# EAGLE board ospi_v12 (EAGLE 6.4)
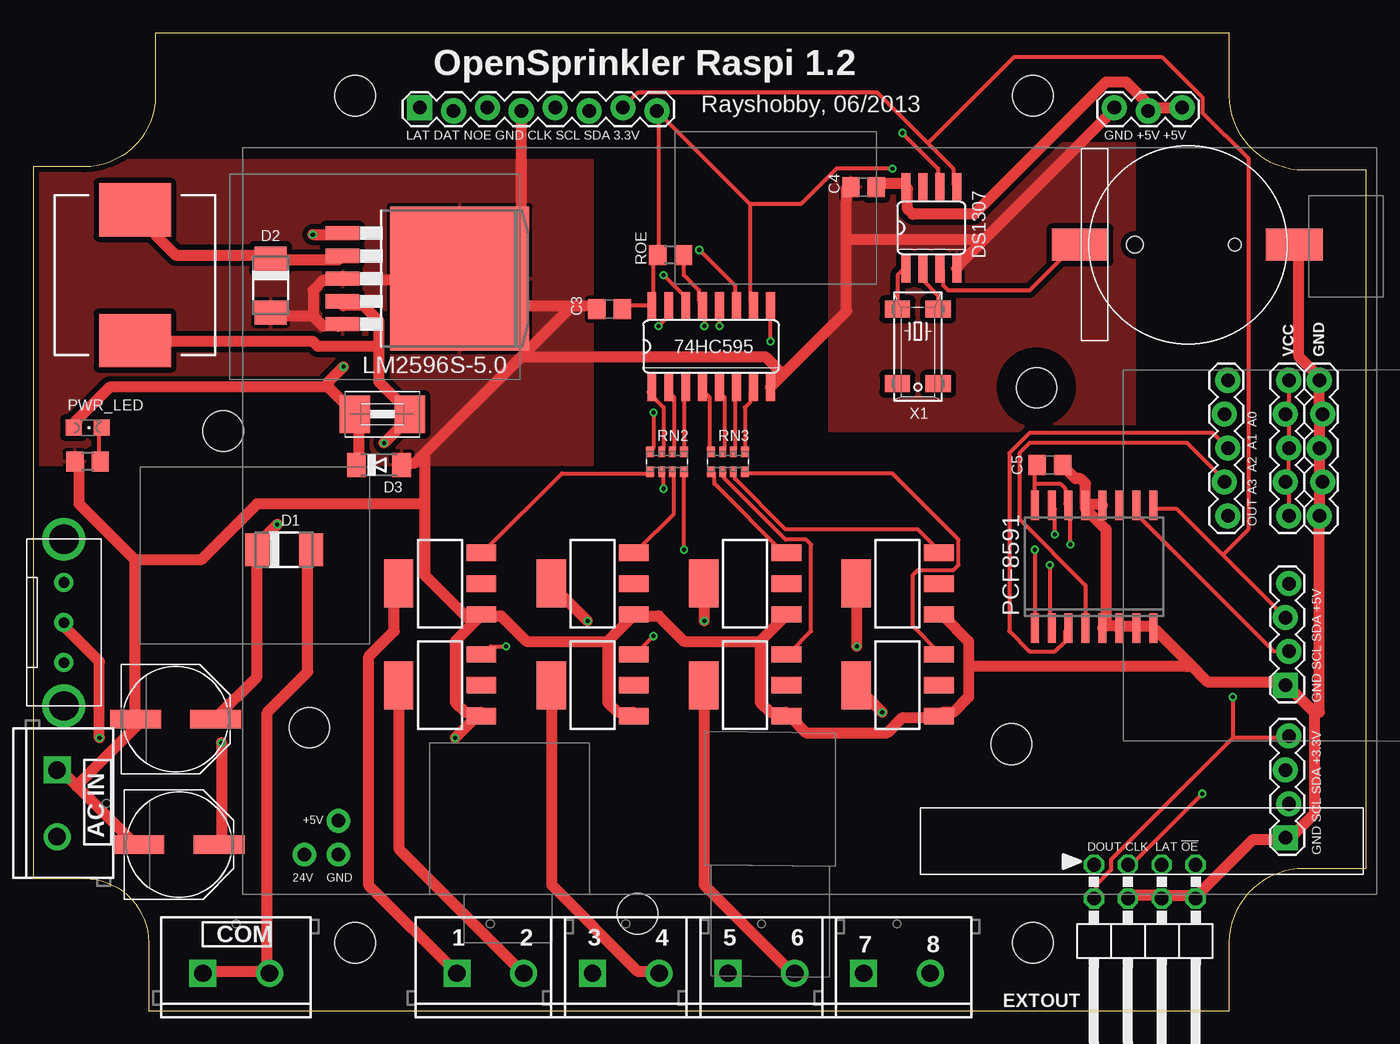
[diagram p0: board, top side]
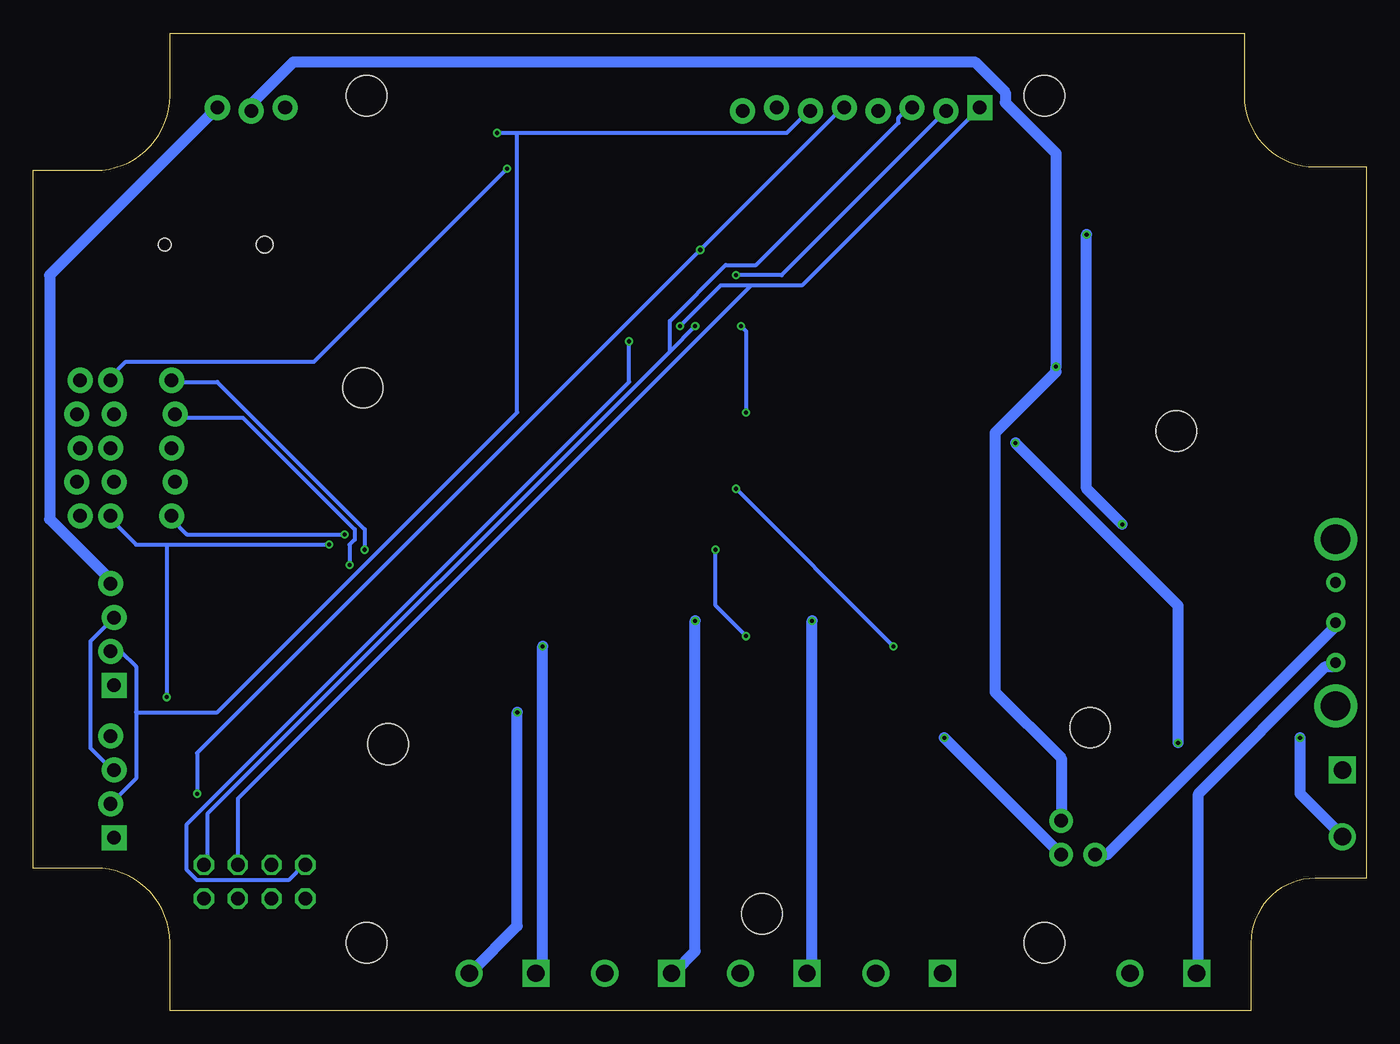
[diagram p1: board, bottom side, seen from below]

Size 99.9 x 73.25 mm. Coordinates in mm from the lower left corner, seen from the top.
Outline: 8.64,0 89.66,0 89.66,5.08 arc-90 95.25,10.67 99.9,10.67 99.9,62.99 95.25,62.99 arc-90 89.66,68.58 89.66,73.25 9.14,73.25 9.14,68.58 arc-90 3.81,63.25 0,63.25 0,9.91 3.81,9.91 arc-90 8.64,5.08 8.64,0
Copper layers (1*16): Top 0.035mm / dielectric 1.5mm / Bottom 0.035mm
Design rules "Fusion_eagle_rule_v1.1": minimum track width 6mil, minimum drill 12mil, track to track 6mil, track to pad 6mil, pad to pad 6mil, via to via 6mil, smd to smd 0mil, copper to edge 10mil, drill to drill 10mil, minimum pad ring 10mil, minimum via ring 6mil, stop-mask expansion 2mil, vias tented up to drill 100mil, thermal gap 10mil
Net classes: 0 default: width 0.305 mm, clearance 0.203 mm; 1 power: width 0.813 mm, clearance 0.406 mm
Holes 3.05 mm at 24.13,5.08 74.93,5.08 24.13,68.58 74.93,68.58
tRestrict: area 21.6,2.5 to 26.7,7.6; area 72.4,2.5 to 77.5,7.6; area 21.6,66 to 26.7,71.1; area 72.4,66 to 77.5,71.1; area 18.2,18.7 to 23.2,23.7; area 42.8,4.7 to 47.9,9.8; area 70.7,17.4 to 75.8,22.5; area 72.6,44.2 to 77.7,49.3; area 11.7,40.9 to 16.8,46
bRestrict: area 11.7,40.9 to 16.8,46; area 72.6,44.2 to 77.7,49.3; area 70.7,17.4 to 75.8,22.5; area 42.8,4.7 to 47.9,9.8; area 18.2,18.7 to 23.2,23.7
vRestrict: area 72.6,0.3 to 78.2,1.3; area 2.5,45 to 7.4,45.7

## Footprints (pad centres in the part's own frame; a part is rotated, then mirrored left to right if it is on the bottom)
SO16 = smd 0.66 x 2.032: 1 -4.445,-3.073; 2 -3.175,-3.073; 3 -1.905,-3.073; 4 -0.635,-3.073; 5 0.635,-3.073; 6 1.905,-3.073; 7 3.175,-3.073; 8 4.445,-3.073; 9 4.445,3.073; 10 3.175,3.073; 11 1.905,3.073; 12 0.635,3.073; 13 -0.635,3.073; 14 -1.905,3.073; 15 -3.175,3.073; 16 -4.445,3.073
BATTCON_12MM_SMT = smd 2.4 x 4.3: P$1 0,11.96 | smd 2.4 x 4.2: P$2 0,-4.1 | hole 0.95: 0,7.5 | hole 1.25: 0,0
PANASONIC_E = smd 3.8 x 1.4: + 3,0; - -3,0
C0805 = smd 1.3 x 1.5: 1 -0.95,0; 2 0.95,0
SCREWTERMINAL-5MM-2 = drill 1.3 pad 2.032 square: 1 0,0 | drill 1.3 pad 2.032: 2 5,0
DO-214AC = smd 1.8 x 2.4: A 2.025,0; C -2.025,0
MINIMELF = smd 1.4 x 1.8: A 1.7,0; C -1.7,0
SO08 = smd 0.66 x 2.032: 1 -1.905,-3.073; 2 -0.635,-3.073; 3 0.635,-3.073; 4 1.905,-3.073; 5 1.905,3.073; 6 0.635,3.073; 7 -0.635,3.073; 8 -1.905,3.073
2X04/90 = drill 1.016 octagon: 1 -3.81,-6.35; 2 -3.81,-3.81; 3 -1.27,-6.35; 4 -1.27,-3.81; 5 1.27,-6.35; 6 1.27,-3.81; 7 3.81,-6.35; 8 3.81,-3.81
1812 = smd 2.286 x 2.794: 1 -2.046,0; 2 2.046,0
EG1206 = drill 0.8 pad 1.422: 1 -3,0; 2 0,0; 3 3,0 | drill 2.2: MT1 -6.25,0; MT2 6.25,0
1X08_LOCK = drill 1.016 pad 1.88 square: 1 0,0.127 | drill 1.016 pad 1.88: 2 2.54,-0.127; 3 5.08,0.127; 4 7.62,-0.127; 5 10.16,0.127; 6 12.7,-0.127; 7 15.24,0.127; 8 17.78,-0.127
1X03_LOCK = drill 1.016 pad 1.88: 1 0,0.127; 2 2.54,-0.127; 3 5.08,0.127
1X04_LOCK = drill 1.016 pad 1.88 square: 1 0,0.127 | drill 1.016 pad 1.88: 2 2.54,-0.127; 3 5.08,0.127; 4 7.62,-0.127
1X05_LOCK = drill 1.016 pad 1.88: 1 0,0.127; 2 2.54,-0.127; 3 5.08,0.127; 4 7.62,-0.127; 5 10.16,0.127
CDRH125 = smd 5.4 x 4: 1 0,4.9; 2 0,-4.9
TO263-5 = smd 1.067 x 2.54: 1 -3.404,-5.791; 2 -1.702,-5.791; 3 0,-5.791; 4 1.702,-5.791; 5 3.404,-5.791 | smd 10.8 x 10.41: 6 0,3
SO16W = smd 0.6 x 2.2: 1 -4.445,-4.6; 2 -3.175,-4.6; 3 -1.905,-4.6; 4 -0.635,-4.6; 5 0.635,-4.6; 6 1.905,-4.6; 7 3.175,-4.6; 8 4.445,-4.6; 9 4.445,4.6; 10 3.175,4.6; 11 1.905,4.6; 12 0.635,4.6; 13 -0.635,4.6; 14 -1.905,4.6; 15 -3.175,4.6; 16 -4.445,4.6
CHIPLED_0805 = smd 1.2 x 1.2: A 0,-1.05; C 0,1.05
R0805 = smd 1.3 x 1.5: 1 -0.95,0; 2 0.95,0
EXB38V = smd 0.6 x 0.8: 1 -1.275,-0.75; 4 1.275,-0.75; 5 1.275,0.75; 8 -1.275,0.75 | smd 0.5 x 0.8: 2 -0.4,-0.75; 3 0.4,-0.75; 6 0.4,0.75; 7 -0.4,0.75
SOT223 = smd 1.219 x 2.235: 1 -2.311,-3.099; 2 0,-3.099; 3 2.311,-3.099 | smd 3.6 x 2.2: 4 0,3.099
1X01-CLEANBIG = drill 1.016 pad 1.778: 1 0,0
OSPI = hole 3.048: 25,-6; 53,6.735; 84.06,-29.465 | hole 3: 77.6,-7.225; 23.1,-32.725
MM20SS = smd 1.27 x 1.88: 1 -2.794,-1.524; 2 2.794,-1.524; 3 2.794,1.524; 4 -2.794,1.524

## Placement (x,y rotation side)
74HC595  74HC595N  [SO16]  50.8,49.78 0 top
BAT1  [BATTCON_12MM_SMT]  82.55,57.4 270 top
C1  100u/50V  [PANASONIC_E]  10.67,21.84 0 top
C2  100u  [PANASONIC_E]  10.92,12.45 0 top
C3  0.1u  [C0805]  43.18,52.58 180 top
C4  0.1u  [C0805]  62.23,61.72 180 top
C5  0.1u  [C0805]  76.2,40.89 0 top
COM  [SCREWTERMINAL-5MM-2]  12.7,2.79 0 top
D1  S1B  [DO-214AC]  18.8,34.54 0 top
D2  SS14  [DO-214AC]  17.78,54.36 270 top
D3  5.6V  [MINIMELF]  25.91,40.89 0 top
DS1307  DS1307  [SO08]  67.31,58.67 0 top
EXTOUT1  [2X04/90]  83.31,4.57 180 top
F2  [1812]  26.16,44.7 180 top
J0  24VAC IN  [SCREWTERMINAL-5MM-2]  1.78,18.03 270 top
J2  EG1206  [EG1206]  2.29,29.08 270 top
JP1  [1X08_LOCK]  28.96,67.56 0 top
JP2  [1X03_LOCK]  81.03,67.56 0 top
JP3  [1X04_LOCK]  93.98,24.38 90 top
JP4  [1X04_LOCK]  93.98,12.95 90 top
JP5  [1X05_LOCK]  89.41,47.24 270 top
JP6  [1X05_LOCK]  93.98,47.24 270 top
JP7  [1X05_LOCK]  96.52,37.08 90 top
L1  150uH  [CDRH125]  7.62,55.12 0 top
LM2596S-5.0  LM2596S-5.0  [TO263-5]  28.96,54.86 270 top
PCF8591  PCF8591T  [SO16W]  79.5,33.27 0 top
PWR_LED  [CHIPLED_0805]  4.06,43.69 270 top
RLED  1K  [R0805]  4.06,41.15 180 top
RN2  [EXB38V]  47.5,41.15 0 top
RN3  [EXB38V]  52.07,41.15 0 top
ROE  10K  [R0805]  47.75,56.64 180 top
S12  [SCREWTERMINAL-5MM-2]  31.75,2.79 0 top
S34  [SCREWTERMINAL-5MM-2]  41.91,2.79 0 top
S56  [SCREWTERMINAL-5MM-2]  52.07,2.79 0 top
S78  [SCREWTERMINAL-5MM-2]  62.23,2.79 0 top
T1  MAC97  [SOT223]  30.48,32 90 top
T2  MAC97  [SOT223]  30.48,24.38 90 top
T3  MAC97  [SOT223]  41.91,32 90 top
T4  MAC97  [SOT223]  41.91,24.38 90 top
T5  MAC97  [SOT223]  53.34,32 90 top
T6  MAC97  [SOT223]  53.34,24.38 90 top
T7  MAC97  [SOT223]  64.77,32 90 top
T8  MAC97  [SOT223]  64.77,24.38 90 top
TP1  [1X01-CLEANBIG]  20.32,11.68 0 top
TP2  [1X01-CLEANBIG]  22.86,11.68 0 top
TP3  [1X01-CLEANBIG]  22.86,14.22 0 top
U$2  OSPI  [OSPI]  98.3,13.97 180 top
X1  32.768kHz  [MM20SS]  66.29,49.78 270 top

## Library data of the parts
74HC595 COM J0 JP2-JP7 S12 S34 S56 S78 T1-T8 = SparkFun
BAT1 JP1 L1 = SparkFunNew
C1 C2 = resistor
C3-C5 RLED ROE = rcl
D1-D3 = diode
DS1307 F2 J2 PWR_LED TP1-TP3 = adafruit
EXTOUT1 = pinhead
LM2596S-5.0 = national-semiconductor; MF: NATIONAL SEMICONDUCTOR; MPN: LM2596S-ADJ/NOPB; OC_FARNELL: 9494367; OC_NEWARK: 41K3842
PCF8591 = micro-philips; MPN: PCF8591T/2,512; OC_FARNELL: 1826767; OC_NEWARK: 70R6911
RN2 RN3 = resistor-dil; OC_FARNELL: unknown; OC_NEWARK: unknown
U$2 = RaspberryPi
X1 = crystal; OC_FARNELL: unknown; OC_NEWARK: unknown

## Nets
24VAC [power]: COM.1 COM.2 D1.A J2.3
A1: 74HC595.13 EXTOUT1.1 JP1.3 ROE.1
AIN0: JP5.1 PCF8591.1
AIN1: JP5.2 PCF8591.2
AIN2: JP5.3 PCF8591.3
AIN3: JP5.4 PCF8591.4
AOUT: JP5.5 PCF8591.15
D5: 74HC595.14 JP1.2
D6: 74HC595.11 EXTOUT1.5 JP1.5
D7: 74HC595.12 EXTOUT1.3 JP1.1
GND [power]: 74HC595.8 BAT1.P$1 C1.- C2.- C3.2 C4.2 C5.2 D2.A D3.A DS1307.4 EXTOUT1.2 EXTOUT1.4 EXTOUT1.6 J0.1 JP1.4 JP2.1 JP3.1 JP4.1 JP7.1 JP7.2 JP7.3 JP7.4 JP7.5 LM2596S-5.0.3 LM2596S-5.0.5 LM2596S-5.0.6 PCF8591.5 PCF8591.6 PCF8591.7 PCF8591.8 PCF8591.12 PCF8591.13 RLED.2 T1.1 T2.1 T3.1 T4.1 T5.1 T6.1 T7.1 T8.1 TP2.1
N$1: PWR_LED.C RLED.1
N$2 [power]: C1.+ D1.C LM2596S-5.0.1
N$3: RN2.1 T1.3
N$4: 74HC595.5 RN3.7
N$5: 74HC595.6 RN3.6
N$6 [power]: J0.2 J2.2 TP1.1
N$7: 74HC595.7 RN3.5
N$8 [power]: D2.C L1.1 LM2596S-5.0.2
N$9: DS1307.1 X1.1
N$10: 74HC595.4 RN3.8
N$11: 74HC595.3 RN2.5
N$12: 74HC595.2 RN2.6
N$13: 74HC595.1 RN2.7
N$14: 74HC595.15 RN2.8
N$15: RN2.2 T2.3
N$16 [power]: S12.1 T1.4
N$17 [power]: S12.2 T2.4
N$18 [power]: S34.1 T3.4
N$19: RN2.3 T3.3
N$20 [power]: S34.2 T4.4
N$21: RN2.4 T4.3
N$22 [power]: S56.1 T5.4
N$23 [power]: S56.2 T6.4
N$24 [power]: S78.1 T7.4
N$25 [power]: S78.2 T8.4
N$26: RN3.1 T5.3
N$27: RN3.2 T6.3
N$28: RN3.3 T7.3
N$29: RN3.4 T8.3
N$30: DS1307.2 X1.4
N$36: BAT1.P$2 DS1307.3
QH*: 74HC595.9 EXTOUT1.7
SCL: DS1307.6 JP1.6 JP3.2 JP4.2 PCF8591.10
SDA: DS1307.5 JP1.7 JP3.3 JP4.3 PCF8591.9
VCC: 74HC595.10 74HC595.16 C3.1 C5.1 EXTOUT1.8 JP1.8 JP4.4 JP6.1 JP6.2 JP6.3 JP6.4 JP6.5 PCF8591.14 PCF8591.16 ROE.2
VIN [power]: C4.1 D3.C DS1307.8 F2.2 JP2.2 JP2.3 JP3.4 PWR_LED.A TP3.1
VIN_PRE [power]: C2.+ F2.1 L1.2 LM2596S-5.0.4

## Tracks (layer width: path | path; a pad name or v marks a point on that pad's centre or on a via)
24VAC
  Top 0.813: D1.A 20.57,34.54 20.57,25.4 17.53,22.35 17.53,2.92 COM.2 17.14,2.92 12.95,2.92 COM.1
  Bottom 0.813: J2.3 2.29,25.78 3.05,25.78 12.57,16.26 12.57,2.92 COM.1
A1  (via drill 0.3)
  Top 0.305: ROE.1 48.77,56.64 48.77,55.12 49.91,53.97 49.91,53.21 74HC595.13 50.29,52.83 v50.29,51.31
  Bottom 0.305: v50.29,51.31 52.2,49.4 | 52.2,49.4 86.87,14.73 86.87,10.92 EXTOUT1.1 | 52.2,49.4 52.2,51.69 48.01,55.88 45.72,55.88 35.05,66.55 35.05,66.93 34.29,67.69 JP1.3
AIN0  (via drill 0.3)
  Top 0.305: v75.06,34.54 PCF8591.1
  Bottom 0.305: v75.06,34.54 75.06,36.07 86.11,47.12 89.53,47.12 JP5.1
AIN1  (via drill 0.3)
  Top 0.305: v76.2,33.4 76.2,28.83 PCF8591.2
  Bottom 0.305: v76.2,33.4 76.2,34.92 75.82,35.31 75.82,36.07 84.2,44.45 89.15,44.45 JP5.2
AIN2
  Top 0.305: JP5.3 88.39,43.31 74.68,43.31 73.15,41.78 73.15,28.45 74.68,26.92 76.58,26.92 77.34,27.69 77.34,28.45 PCF8591.3
AIN3
  Top 0.305: PCF8591.4 78.87,31.88 73.91,36.83 73.91,41.78 74.68,42.54 86.49,42.54 89.15,39.88 JP5.4
AOUT  (via drill 0.3)
  Top 0.305: v76.58,35.69 76.58,37.59 PCF8591.15
  Bottom 0.305: v76.58,35.69 88.39,35.69 89.53,36.83 JP5.5
D5  (via drill 0.3)
  Top 0.305: v47.24,55.12 48.77,53.59 48.77,53.21 74HC595.14
  Bottom 0.305: v47.24,55.12 43.81,55.12 JP1.2
D6  (via drill 0.3)
  Top 0.305: v49.91,57.02 52.58,54.36 52.58,53.21 74HC595.11 | v87.63,16.26 82.3,10.92 EXTOUT1.5
  Bottom 0.305: JP1.5 39.24,67.69 v49.91,57.02 87.63,19.3 v87.63,16.26
D7  (via drill 0.3)
  Top 0.305: v51.44,51.31 74HC595.12
  Bottom 0.305: v51.44,51.31 48.39,54.36 46.1,54.36 | 46.1,54.36 42.29,54.36 JP1.1 | EXTOUT1.3 84.58,15.88 46.1,54.36
GND  (via drill 0.3)
  Top 0.813: BAT1.P$1 94.87,57.4 94.87,49.02 96.39,47.5 JP7.5 96.39,44.83 JP7.4 96.39,44.45 JP7.3 96.39,39.88 JP7.2 96.39,39.5 JP7.1 96.39,22.35 96.01,22.35 | EXTOUT1.6 82.3,8.64 84.58,8.64 EXTOUT1.4 84.96,8.64 86.87,8.64 EXTOUT1.2 87.25,8.64 91.44,12.83 93.73,12.83 JP4.1 94.11,13.21 94.49,13.21 96.01,14.73 96.01,22.35 | 70.1,25.78 70.1,27.69 68.2,29.59 T7.1 | 70.1,25.78 70.1,23.5 68.96,22.35 68.2,22.35 T8.1 67.82,21.97 65.15,21.97 64.01,20.83 57.91,20.83 56.77,21.97 T6.1 56.39,22.35 55.24,22.35 54.48,23.11 54.48,27.69 | 82.68,28.83 81.53,28.83 PCF8591.6 81.15,28.83 80.39,28.83 PCF8591.5 80.39,29.21 80.39,36.07 78.87,37.59 PCF8591.13 78.87,37.97 | 82.68,28.83 PCF8591.7 | 82.68,28.83 83.82,28.83 PCF8591.8 84.2,28.45 86.68,25.97 | 78.87,37.97 78.87,39.5 78.49,39.88 78.11,39.88 77.34,40.64 C5.2 | 78.87,37.97 80.01,37.97 PCF8591.12 | 86.68,25.97 88.01,24.64 93.73,24.64 JP3.1 94.11,24.26 96.01,22.35 | 70.1,25.78 86.49,25.78 86.68,25.97 | 60.96,57.78 60.96,52.45 56.2,47.69 | 60.96,57.78 60.96,61.59 C4.2 | 56.2,47.69 55.24,46.74 74HC595.8 | 71.06,57.59 81.15,67.69 JP2.1 | 71.06,57.59 69.34,55.88 DS1307.4 | 60.96,57.78 70.87,57.78 71.06,57.59 | 3.24,16.83 1.91,18.16 J0.1 | 3.24,16.83 7.62,12.45 C2.- | 7.62,33.78 3.43,37.97 3.43,41.02 RLED.2 | 7.62,33.78 7.62,21.97 C1.- 8,21.59 3.24,16.83 | 54.48,27.69 56.39,29.59 T5.1 | 43.05,27.69 43.05,23.11 43.81,22.35 44.96,22.35 T4.1 | 43.05,27.69 44.96,29.59 T3.1 45.34,29.59 46.86,29.59 48.77,27.69 54.48,27.69 | T1.1 33.53,29.59 31.62,27.69 31.62,23.11 32.38,22.35 33.53,22.35 T2.1 33.15,21.97 v31.62,20.45 | 20.95,52.07 17.91,52.07 D2.A
  Top 0.813: 20.95,52.07 21.72,51.31 22.86,51.31 LM2596S-5.0.5 | 40.01,52.83 33.91,52.83 32,54.74 LM2596S-5.0.6 | 40.01,52.83 41.91,52.83 C3.2 | 36.77,49.21 40.01,52.45 40.01,52.83 | 36.77,49.21 29.15,41.59 | 29.15,41.59 28.57,41.02 27.81,41.02 D3.A | LM2596S-5.0.6 31.62,54.74 23.24,54.74 LM2596S-5.0.3 22.86,54.74 21.72,54.74 20.95,53.97 20.95,52.07 | JP1.4 36.58,53.21 LM2596S-5.0.6 | 29.34,37.97 29.34,41.4 29.15,41.59 | 29.34,37.97 29.34,32.64 32.77,29.21 T1.1 | 43.05,27.69 36.96,27.69 35.05,29.59 33.91,29.59 T1.1 | 7.62,33.78 12.57,33.78 16.76,37.97 29.34,37.97 | 56.2,47.69 54.86,49.02 36.96,49.02 36.77,49.21
  Bottom 0.813: v31.62,20.45 TP2.1
  pour Top (isolate 0.406): 0,63.75 41.91,63.75 41.91,40.89 0,40.89
  pour Top (isolate 0.406): 59.69,65.02 82.55,65.02 82.55,43.43 59.69,43.43
N$1
  Top 0.305: PWR_LED.C 4.95,43.69 4.95,41.4 RLED.1
N$2  (via drill 0.3)
  Top 0.813: C1.+ 13.72,21.97 16.76,25.02 D1.C 16.76,34.92 v18.29,36.45 | v20.95,58.17 22.86,58.17 LM2596S-5.0.1
  Bottom 0.813: v20.95,58.17 20.95,39.12 v18.29,36.45
N$3
  Top 0.305: RN2.1 46.1,40.26 39.62,40.26 33.91,34.54 T1.3
N$4
  Top 0.305: RN3.7 51.82,42.16 51.82,45.97 51.44,46.35 74HC595.5
N$5
  Top 0.305: RN3.6 52.58,42.16 52.58,46.35 74HC595.6
N$6  (via drill 0.3)
  Top 0.813: v4.95,20.45 4.95,26.16 2.29,28.83 J2.2
  Bottom 0.813: v4.95,20.45 4.95,16.26 1.91,13.21 J0.2 | TP1.1 19.43,11.68 2.29,28.83 J2.2
N$7
  Top 0.305: RN3.5 53.34,42.16 53.34,45.21 53.72,45.59 53.72,46.35 74HC595.7
N$8
  Top 0.813: LM2596S-5.0.2 22.86,56.26 17.91,56.26 D2.C 17.53,56.64 10.67,56.64 7.62,59.69 L1.1
N$9
  Top 0.305: X1.1 64.77,55.12 65.15,55.5 DS1307.1
N$10
  Top 0.305: RN3.8 50.67,42.16 50.67,45.97 50.29,46.35 74HC595.4
N$11
  Top 0.305: RN2.5 48.77,42.16 48.77,46.35 74HC595.3
N$12
  Top 0.305: RN2.6 48.01,42.16 48.01,45.97 47.62,46.35 74HC595.2
N$13
  Top 0.305: RN2.7 47.24,42.16 47.24,45.21 46.1,46.35 74HC595.1
N$14  (via drill 0.3)
  Top 0.305: v46.48,44.83 46.48,42.16 RN2.8 | v46.86,51.31 47.62,52.07 74HC595.15
  Bottom 0.305: v46.48,44.83 46.48,50.93 v46.86,51.31
N$15  (via drill 0.3)
  Top 0.305: v47.24,39.12 47.24,40.26 RN2.2 | v35.43,27.3 34.29,27.3 33.91,26.92 T2.3
  Bottom 0.305: v35.43,27.3 v47.24,39.12
N$16
  Top 0.813: S12.1 25.15,9.4 25.15,26.54 27.05,28.45 27.05,31.88 T1.4
N$17
  Top 0.813: T2.4 27.43,24.26 27.43,12.06 36.58,2.92 S12.2
N$18  (via drill 0.3)
  Top 0.813: v41.53,29.21 38.86,31.88 T3.4
  Bottom 0.813: v41.53,29.21 41.53,3.3 41.91,2.92 S34.1
N$19
  Top 0.305: RN2.3 48.01,40.26 48.01,37.21 45.34,34.54 T3.3
N$20
  Top 0.813: T4.4 38.86,24.26 38.86,9.4 45.34,2.92 46.86,2.92 S34.2
N$21  (via drill 0.3)
  Top 0.305: v48.77,34.54 48.77,40.26 RN2.4 | v46.48,28.07 45.34,26.92 T4.3
  Bottom 0.305: v48.77,34.54 48.77,30.35 v46.48,28.07
N$22  (via drill 0.3)
  Top 0.813: v50.29,29.21 50.29,31.88 T5.4
  Bottom 0.813: v50.29,29.21 50.29,4.45 51.82,2.92 S56.1
N$23
  Top 0.813: T6.4 50.29,24.26 50.29,9.4 56.77,2.92 S56.2
N$24  (via drill 0.3)
  Top 0.813: v61.72,27.3 61.72,31.88 T7.4
  Bottom 0.813: v61.72,27.3 61.72,3.3 S78.1
N$25  (via drill 0.3)
  Top 0.813: v63.63,22.35 61.72,24.26 T8.4
  Bottom 0.813: v63.63,22.35 63.63,6.35 67.06,2.92 S78.2
N$26
  Top 0.305: RN3.1 51.05,40.26 51.05,39.5 56.39,34.16 T5.3
N$27
  Top 0.305: RN3.2 51.82,40.26 51.82,39.88 56.39,35.31 57.91,35.31 58.29,34.92 58.29,28.45 56.77,26.92 T6.3
N$28
  Top 0.305: RN3.3 52.58,40.26 52.58,39.88 56.39,36.07 66.29,36.07 67.82,34.54 T7.3
N$29
  Top 0.305: RN3.4 53.34,40.26 64.39,40.26 69.34,35.31 69.34,33.4 68.96,33.02 66.29,33.02 65.91,32.64 65.91,28.83 67.82,26.92 T8.3
N$30
  Top 0.305: X1.4 67.82,53.59 66.67,54.74 DS1307.2
N$36
  Top 0.305: DS1307.3 68.2,55.5 68.2,54.36 68.58,53.97 74.68,53.97 78.11,57.4 BAT1.P$2
QH*  (via drill 0.3)
  Top 0.305: v55.24,50.16 74HC595.9
  Bottom 0.305: v55.24,50.16 55.24,47.12 88.39,13.97 88.39,10.54 87.63,9.78 80.77,9.78 79.63,10.92 EXTOUT1.7
SCL  (via drill 0.3)
  Top 0.305: v65.15,65.79 67.82,63.12 67.82,61.98 DS1307.6 | PCF8591.10 82.68,37.21 92.96,26.92 JP3.2
  Bottom 0.305: 63.63,65.79 43.43,65.79 41.91,67.31 JP1.6 | 63.63,65.79 v65.15,65.79 | JP4.2 92.2,17.4 92.2,22.35 | 92.2,22.35 92.2,25.78 93.34,26.92 JP3.2 | 63.63,65.79 63.63,44.83 86.11,22.35 92.2,22.35
SDA
  Top 0.305: JP3.3 89.15,34.16 | 89.15,34.16 85.72,37.59 84.2,37.59 PCF8591.9 | 67.06,65.02 63.25,68.83 45.34,68.83 JP1.7 | 67.06,65.02 68.96,63.12 68.96,61.98 DS1307.5 | 89.15,34.16 91.06,36.07 91.06,63.88 87.63,67.31 87.63,68.45 84.58,71.5 73.53,71.5 67.06,65.02
  Bottom 0.305: JP3.3 95.63,27.69 95.63,19.69 94.11,18.16 JP4.3
VCC  (via drill 0.3)
  Top 0.305: 89.92,20.45 80.77,11.3 80.77,10.54 79.63,9.4 79.63,8.64 EXTOUT1.8 | 89.92,20.45 94.11,20.45 JP4.4 | C3.1 44.2,52.83 46.1,52.83 74HC595.16 46.48,53.21 46.48,56.64 ROE.2 46.86,56.64 46.86,67.31 | 53.72,60.45 53.72,53.21 74HC595.10 | 46.86,67.31 53.72,60.45 | 46.86,67.31 JP1.8 | JP6.1 94.11,44.83 JP6.2 94.11,44.45 JP6.3 94.11,39.88 JP6.4 94.11,39.5 JP6.5 | PCF8591.16 75.06,39.5 | 75.06,39.5 75.06,40.64 C5.1 | 75.06,39.5 76.96,39.5 77.34,39.12 77.34,37.97 PCF8591.14 77.72,37.59 v77.72,34.92 | 53.72,60.45 57.53,60.45 60.2,63.12 v64.39,63.12 | v89.92,23.5 89.92,20.45
  Bottom 0.305: 89.92,34.92 92.2,34.92 94.11,36.83 JP6.5 | 89.92,34.92 v77.72,34.92 | v64.39,63.12 78.87,48.64 92.96,48.64 94.11,47.5 JP6.1 | 89.92,34.92 v89.92,23.5
VIN  (via drill 0.3)
  Top 0.813: 22.1,46.74 5.71,46.74 3.05,44.07 3.05,43.69 PWR_LED.A | 22.1,46.74 24,44.83 F2.2 24.38,44.45 24.38,41.02 D3.C | C4.1 63.25,61.98 65.15,61.98 DS1307.8 65.53,61.59 65.53,60.07 65.91,59.69 70.48,59.69 80.39,69.6 81.92,69.6 83.82,67.69 JP2.2 84.2,67.69 JP2.3 | v23.24,48.26 22.1,47.12 22.1,46.74
  Bottom 0.813: JP2.3 98.68,55.12 98.68,36.83 94.11,32.26 JP3.4 | JP2.2 83.82,67.69 80.39,71.12 29.34,71.12 27.05,68.83 27.05,68.07 23.24,64.26 v23.24,48.26 23.24,47.88 27.81,43.31 27.81,23.88 22.86,18.92 TP3.1
VIN_PRE  (via drill 0.3)
  Top 0.813: 25.91,49.78 25.91,47.12 28.19,44.83 F2.1 28.19,44.45 v26.29,42.54 | 25.91,49.78 25.91,51.69 24.77,52.83 23.24,52.83 LM2596S-5.0.4 | v14.1,20.07 14.1,12.45 C2.+ | 25.91,49.78 21.34,49.78 20.95,50.16 7.62,50.16 L1.2
  Bottom 0.813: v14.1,20.07 14.1,30.35 v26.29,42.54

## Text on the board
tNames: OpenSprinkler Raspi 1.2 | Rayshobby, 06/2013 | LAT DAT NOE GND CLK SCL SDA 3.3V | GND +5V +5V | VCC | GND | OUT A3 A2 A1 A0 | GND SCL SDA +5V | +5V | AC IN | DOUT CLK LAT !OE | GND SCL SDA +3.3V | 24V | GND | 1 | 2 | 3 | 4 | 5 | 6 | 7 | 8 | EXTOUT
BoxDim: Serpac WM-032 Enclosure | All units are in inch | Left | Right | Front | Bottom